# Altium PCB 立创EDA_PCB_2021-11-04.pcbdoc
Units mil, origin at the board's own origin, x right, y up, seen from the top; angles counter-clockwise.
Board outline 4632.05 x 6746.26 mil, 2 copper layers (Top Layer, Bottom Layer); 28 components, 43 nets, 127 pads, 46 vias.
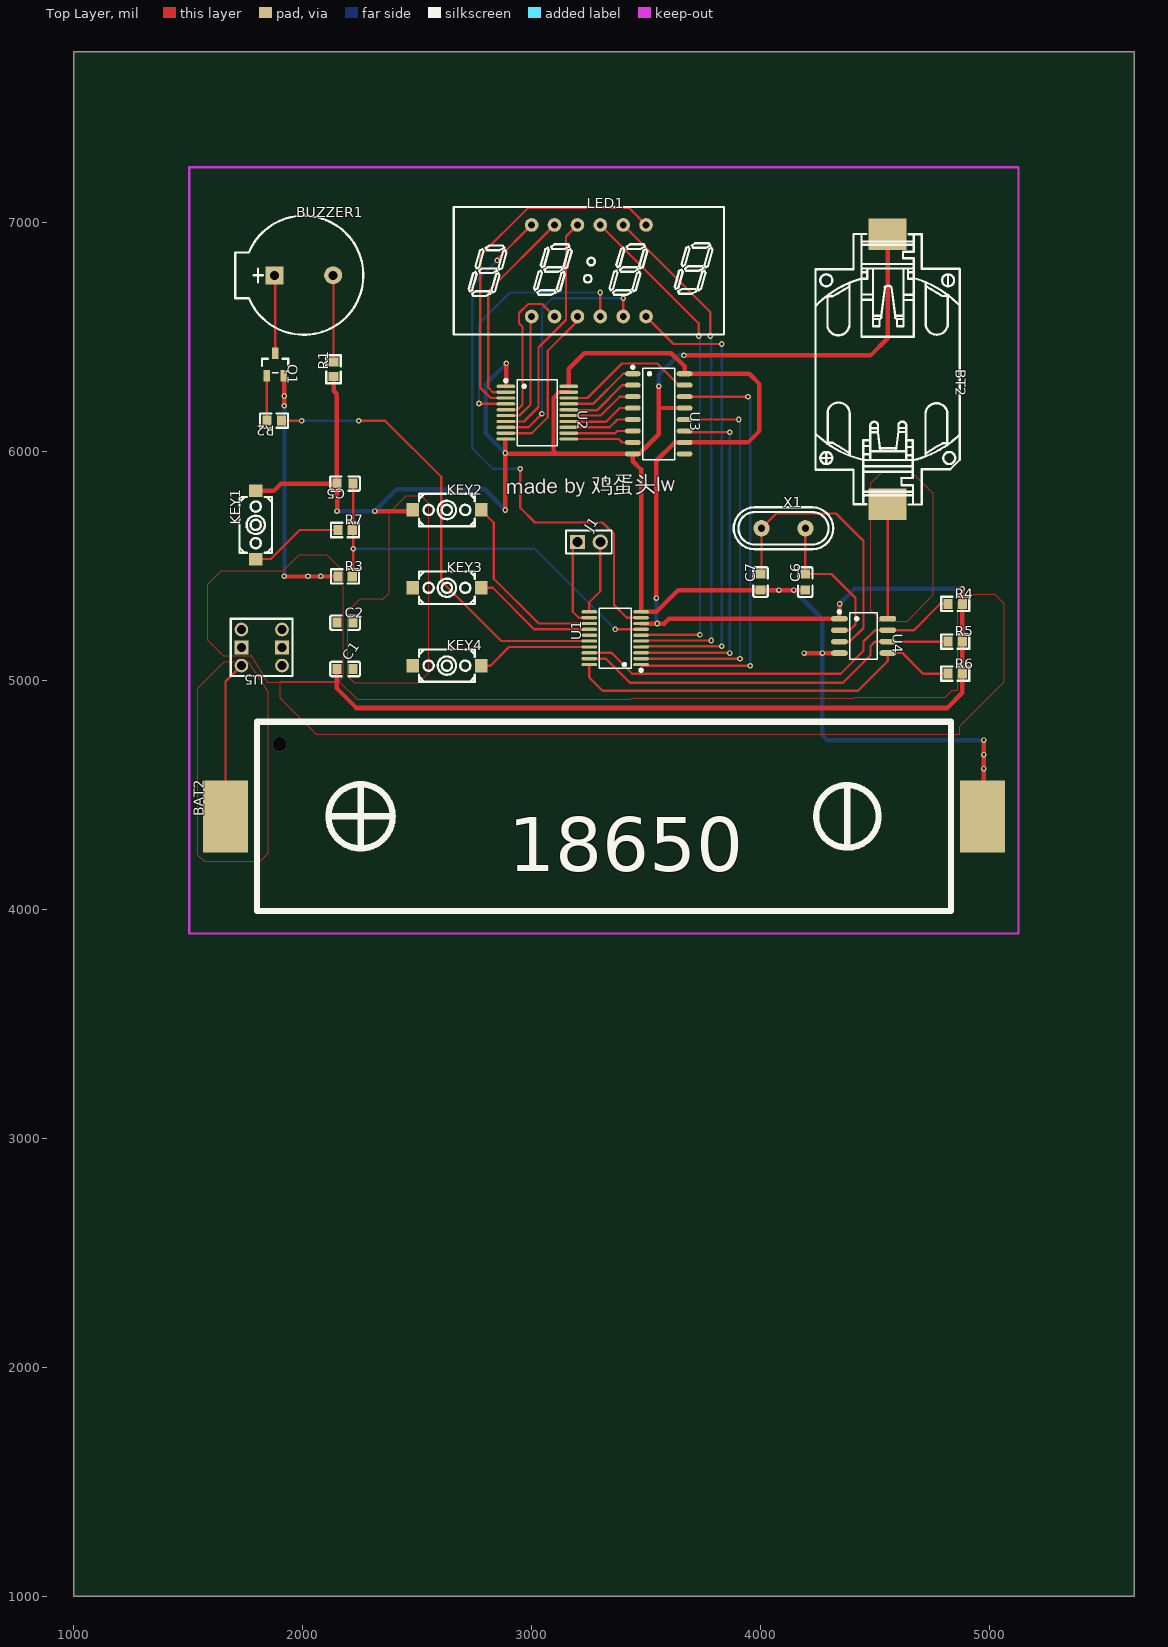
[diagram p0: Top Layer view]
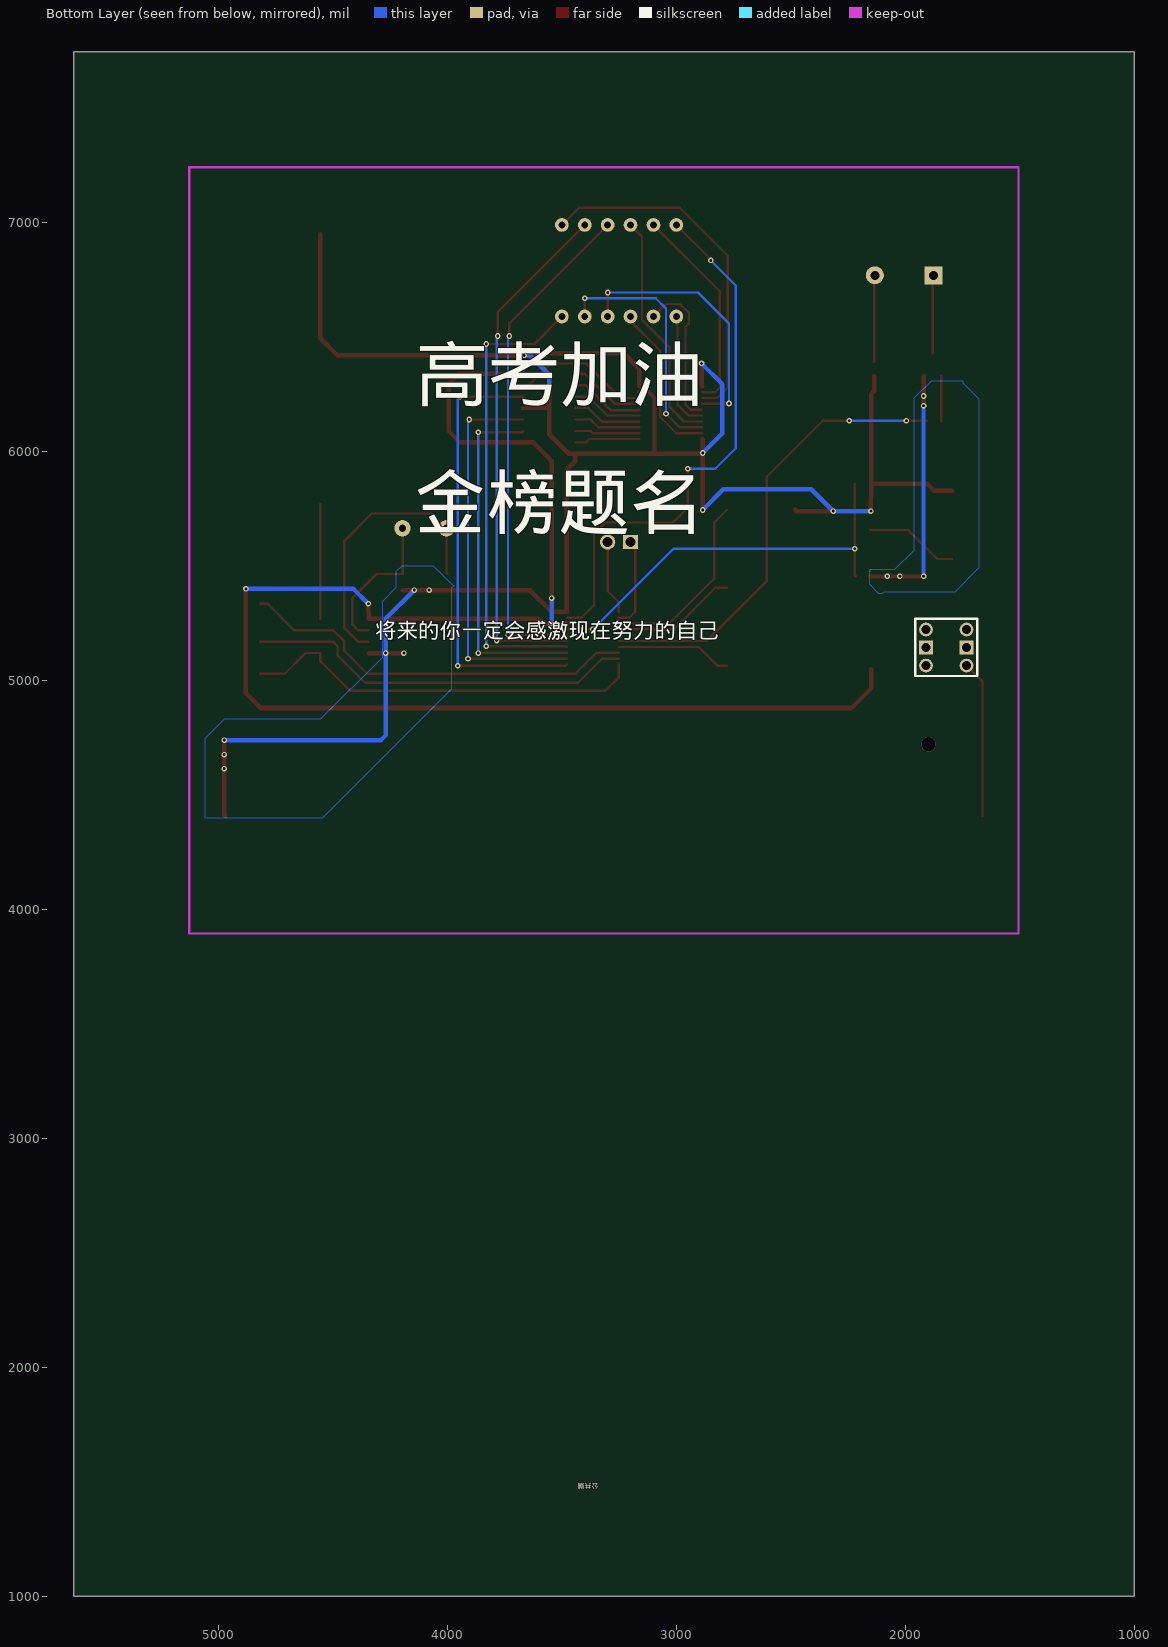
[diagram p1: Bottom Layer view, seen from below]

## Layer stack, top to bottom
Top Layer: signal copper (thickness not stored)
Dielectric: dielectric 12.6, FR-4, Dk 4.8
Bottom Layer: signal copper (thickness not stored)

## Board outline
5632.05,1000 1000,1000 1000,7746.26 5632.05,7746.26

## Components (designator, comment, footprint, x,y, rotation, side; value= is the part's Value field where it differs from the comment)
BAT2 "18650" 18650电池座-贴片 3316.02,4406.61 r90 top
BT2 "BS-6-1" BAT-SMD_BS-6-1 4555,6359.8 r270 top
BUZZER1 "BL-PBZ12065C2705RA" BUZ-SMD_BL-PBZ12065C2705RA 2005,6769.8 r0 top
C1 "0.1u" C0603 2185.01,5050.1 r0 top
C2 "22u" C0603 2185.01,5252.45 r0 top
C5 "10u" C0603 2185.01,5859.9 r180 top
C6 "0.1u" C0603 4195,5429.8 r90 top
C7 "0.1u" C0603 4000,5429.8 r90 top
J1 "HDR-M-2.54_1x2" HDR-M-2.54_1X2 3250,5604.8 r0 top
KEY1 "K2-3.6×6.1_SMD" KEY-SMD_2P-L6.2-W3.6-LS8.0 1795,5679.8 r90 top
KEY2 "K2-3.6×6.1_SMD" KEY-SMD_2P-L6.2-W3.6-LS8.0 2630,5744.8 r0 top
KEY3 "K2-3.6×6.1_SMD" KEY-SMD_2P-L6.2-W3.6-LS8.0 2630,5404.8 r0 top
KEY4 "K2-3.6×6.1_SMD" KEY-SMD_2P-L6.2-W3.6-LS8.0 2630,5064.8 r0 top
LED1 "FJ3462AH" LED-SEG-TH_12P-L30.0-W14.0-P2.54-S10.16-BL_FJ3462XH 3250,6789.8 r0 top
Q1 "2N3906(SOT-23)" SOT-23-3_L2.9-W1.6-P1.90-LS2.8-TR-CW 1880,6379.8 r270 top
R1 "100" R0603 2135,6359.8 r90 top
R2 "100" R0603 1875,6134.8 r180 top
R3 "10k" R0603 2185,5454.8 r0 top
R4 "5.1k" R0603 4850,5334.8 r0 top
R5 "5.1k" R0603 4850,5169.8 r0 top
R6 "5.1k" R0603 4850,5029.8 r0 top
R7 "301R" R0603 2185,5657.35 r0 top
U1 "STC8G1K08-38I-TSSOP20" TSSOP-20_L6.5-W4.4-P0.65-LS6.4-BL 3365,5184.8 r90 top
U2 "74HC245DB" SSOP-20_L7.2-W5.3-P0.65-LS7.8-BL 3025,6169.8 r270 top
U3 "TM74HC595D" SOP-16_L10.0-W3.9-P1.27-LS6.0-BL 3555,6164.8 r270 top
U4 "DS1302M/TR_C910881" SOP-8_L4.9-W3.9-P1.27-LS6.0-BL 4450,5194.8 r270 top
U5 "6脚自锁按钮开关" 6脚自锁开关 1909.52,5065 r180 top
X1 "32.768MHZ" HC-49US_L11.0-W4.6-P4.88 4100,5664.8 r0 top

## Footprints (in the part's own frame and the unit in brackets; to place one, negate y for a bottom-side part, rotate by r counter-clockwise, add the part's x,y. Pads: shape width x height; smd on the part's side, far side on the other; paste and mask are expansions set on the pad)
6脚自锁开关 [mm]
  round 1.524 hole 1: 1(0,0) 2(4.5,0) 5(0,-4) 6(4.5,-4)
  rect 1.524x1.524 hole 1: 3(0,-2) 4(4.5,-2)
  silkscreen extent -1.18,-5.21 5.68,1.14
18650电池座-贴片 [mm]
  rect 8x5 smd: 1(0,42) 2(0,-42)
  silkscreen extent -10.5,-38.5 10.5,38.5
BAT-SMD_BS-6-1 [mm]
  rect 3.5x4.2 smd: 1(14.988,0) 2(-14.988,0)
  silkscreen extent -14.99,-8 15.01,8
BUZ-SMD_BL-PBZ12065C2705RA [mm]
  rect 2x2 hole 1: 1(-3.25,0)
  round 2 hole 1: 2(3.25,0)
  silkscreen extent -7.62,-6.6 6.6,6.6
C0603 [mm]
  rect 1x1.1 smd: 1(-0.9,0) 2(0.9,0)
  silkscreen extent -1.65,-0.8 1.65,0.8
HC-49US_L11.0-W4.6-P4.88 [mm]
  round 1.8 hole 0.8: 1(-2.44,0) 2(2.44,0)
  silkscreen extent -5.51,-2.32 5.51,2.32
HDR-M-2.54_1X2 [mm]
  rect 1.7x1.575 hole 1.1: 1(-1.27,0)
  round 1.7 hole 1.1: 2(1.27,0)
  silkscreen extent -2.54,-1.27 2.54,1.27
KEY-SMD_2P-L6.2-W3.6-LS8.0 [mm]
  rect 1.4x1.5 smd: 1(-3.8,0) 2(3.8,0)
  silkscreen extent -3.1,-1.8 3.1,1.8
LED-SEG-TH_12P-L30.0-W14.0-P2.54-S10.16-BL_FJ3462XH [mil]
  round 60 hole 30: 1(-250,-200) 2(-150,-200) 3(-50,-200) 4(50,-200) 5(150,-200) 6(250,-200) 7(250,200) 8(150,200) 9(50,200) 10(-50,200) 11(-150,200) 12(-250,200)
  silkscreen extent -591,-279 591,279
R0603 [mm]
  rect 1x1.1 smd: 1(-0.8,0) 2(0.8,0)
  silkscreen extent -1.55,-0.8 1.55,0.81
SOP-8_L4.9-W3.9-P1.27-LS6.0-BL [mm]
  oval 0.63x1.865 smd: 1(-1.905,-2.682) 2(-0.635,-2.682) 3(0.635,-2.682) 4(1.905,-2.682) 5(1.905,2.682) 6(0.635,2.682) 7(-0.635,2.682) 8(-1.905,2.682)
  silkscreen extent -2.82,-2.83 2.58,1.52
SOP-16_L10.0-W3.9-P1.27-LS6.0-BL [mm]
  oval 0.56x1.745 smd: 1(-4.445,-2.873) 2(-3.175,-2.873) 3(-1.905,-2.873) 4(-0.635,-2.873) 5(0.635,-2.873) 6(1.905,-2.873) 7(3.175,-2.873) 8(4.445,-2.873) 9(4.445,2.873) 10(3.175,2.873) 11(1.905,2.873) 12(0.635,2.873) 13(-0.635,2.873) 14(-1.905,2.873) 15(-3.175,2.873) 16(-4.445,2.873)
  silkscreen extent -5.33,-3.02 5.08,1.77
SOT-23-3_L2.9-W1.6-P1.90-LS2.8-TR-CW [mm]
  rect 1.25x0.7 smd: 1(1.25,0.95) 2(1.25,-0.95) 3(-1.25,0)
  silkscreen extent -0.65,-1.46 0.9,1.46
SSOP-20_L7.2-W5.3-P0.65-LS7.8-BL [mm]
  oval 0.364x2.082 smd: 1(-2.925,-3.491) 2(-2.275,-3.491) 3(-1.625,-3.491) 4(-0.975,-3.491) 5(-0.325,-3.491) 6(0.325,-3.491) 7(0.975,-3.491) 8(1.625,-3.491) 9(2.275,-3.491) 10(2.925,-3.491) 11(2.925,3.491) 12(2.275,3.491) 13(1.625,3.491) 14(0.975,3.491) 15(0.325,3.491) 16(-0.325,3.491) 17(-0.975,3.491) 18(-1.625,3.491) 19(-2.275,3.491) 20(-2.925,3.491)
  silkscreen extent -3.71,-3.64 3.68,2.22
TSSOP-20_L6.5-W4.4-P0.65-LS6.4-BL [mm]
  oval 0.364x1.742 smd: 1(-2.925,-2.871) 2(-2.275,-2.871) 3(-1.625,-2.871) 4(-0.975,-2.871) 5(-0.325,-2.871) 6(0.325,-2.871) 7(0.975,-2.871) 8(1.625,-2.871) 9(2.275,-2.871) 10(2.925,-2.871) 11(2.925,2.871) 12(2.275,2.871) 13(1.625,2.871) 14(0.975,2.871) 15(0.325,2.871) 16(-0.325,2.871) 17(-0.975,2.871) 18(-1.625,2.871) 19(-2.275,2.871) 20(-2.925,2.871)
  silkscreen extent -3.71,-3.02 3.33,1.77

## Via types
v1: diameter 24.41, hole 12, Top Layer to Bottom Layer, 45 vias
v2: diameter 62.99, hole 62.99, Top Layer to Bottom Layer, 1 vias

## Nets (pads, with @x,y where several pads share a name; then routed paths per layer and width w, separated by ;. In a path a pad name is that pad's centre, name@x,y a point inside that pad or via, vN(x,y) a via of type N, cw(c..) or ccw(c..) an arc to the next point about the centre after c; other vN are vias at no path point)
595IO: U1.1 U3.14 | length 1935
  Top Layer w10: U1.1 3482.87,5064.8 v1(3955,5064.8) ; U3.14 v1(3945,6239.8)
  Bottom Layer w10: v1(3945,6239.8) 3955,6229.8 v1(3955,5064.8)
595RCK: U1.2 U3.12 | length 1716.1
  Top Layer w10: U1.2 3478.46,5094.8 v1(3910,5094.8) ; U3.12 v1(3905,6139.8)
  Bottom Layer w10: v1(3905,6139.8) 3910,6134.8 v1(3910,5094.8)
595SCK: U1.3 U3.11 | length 1551.4
  Top Layer w10: U1.3 3863.98,5120.82 v1(3865,5119.8) ; U3.11 3673.09,6084.8 v1(3865,6084.8)
  Bottom Layer w10: v1(3865,5119.8) v1(3865,6084.8)
A: LED1.11 U2.2 | length 916.2
  Top Layer w10: U2.2 2830.4,6259.4 2810,6279.8 2810,6699.8 LED1.11
B: LED1.7 U2.3 | length 1549.7
  Top Layer w10: U2.3 2821,6233.8 2775,6279.8 2775,6854.8 2985,7064.8 3425,7064.8 LED1.7
BEEP: R2.1 U1.16 | length 2010.8
  Top Layer w10: R2.1 v1(1995,6134.8) ; v1(2245,6134.8) 2360,6134.8 2605,5889.8 2605,5434.8 2867.79,5172.01 U1.16
  Bottom Layer w10: v1(1995,6134.8) v1(2245,6134.8)
BUZZER1_1: BUZZER1.1 Q1.3 | length 342
  Top Layer w10: BUZZER1.1 1880,6766.85 Q1.3
BUZZER1_2: BUZZER1.2 R1.2 | length 379.4
  Top Layer w10: BUZZER1.2 2135,6767.76 R1.2
C: LED1.4 U2.4 | length 1159.1
  Top Layer w10: v1(2770,6209.8) 2771.61,6208.19 U2.4 ; LED1.4 v1(3300,6694.8)
  Bottom Layer w10: v1(2770,6209.8) 2770,6559.8 2905,6694.8 v1(3300,6694.8)
D: LED1.2 U2.5 | length 682.2
  Top Layer w10: U2.5 2937.8,6182.6 2960,6204.8 2960,6544.8 2945,6559.8 2945,6604.8 2985,6644.8 3045,6644.8 LED1.2
D12: LED1.3 U2.9 | length 705.1
  Top Layer w10: U2.9 3000.4,6080.2 3070,6149.8 3070,6439.8 3200,6569.8 LED1.3
DIG1: LED1.12 U1.9 | length 2408.6
  Top Layer w10: v1(2850,6834.8) 2850,6839.8 LED1.12 ; v1(2950,5924.8) 2950,5754.8 3015,5689.8 3310,5689.8 3360,5639.8 3360,5329.8 3415.4,5274.4 U1.9
  Bottom Layer w10: v1(2850,6834.8) 2740,6724.8 2740,6014.8 2830,5924.8 v1(2950,5924.8)
DIG2: LED1.9 U1.6 | length 2228.1
  Top Layer w10: LED1.9 3730,6559.8 v1(3730,6504.8) ; U1.6 3480.23,5199.8 v1(3735,5199.8)
  Bottom Layer w10: v1(3730,6504.8) 3735,6499.8 v1(3735,5199.8)
DIG3: LED1.8 U1.5 | length 2282.6
  Top Layer w10: LED1.8 3780,6609.8 v1(3780,6504.8) ; U1.5 3480.82,5174.8 v1(3785,5174.8)
  Bottom Layer w10: v1(3780,6504.8) 3785,6499.8 v1(3785,5174.8)
DIG4: LED1.6 U1.4 | length 2053.1
  Top Layer w10: U1.4 3481.42,5149.8 v1(3830,5149.8) ; LED1.6 3620,6469.8 v1(3830,6469.8)
  Bottom Layer w10: v1(3830,5149.8) v1(3830,6469.8)
E: LED1.1 U2.6 | length 517.2
  Top Layer w10: U2.6 2947.2,6157 2995,6204.8 2995,6589.8 LED1.1
F: LED1.10 U2.7 | length 1034.1
  Top Layer w10: U2.7 2966.6,6131.4 3030,6194.8 3030,6454.8 3150,6574.8 3150,6939.8 LED1.10
G: LED1.5 U2.8 | length 1095.5
  Top Layer w10: U2.8 2986.02,6105.82 v1(3045,6164.8) ; LED1.5 v1(3400,6669.8)
  Bottom Layer w10: v1(3045,6164.8) 3045,6624.8 3090,6669.8 v1(3400,6669.8)
GND: BAT2.2 BT2.2 C1.2 C2.2 C5.2 C6.1 C7.1 KEY1.2 KEY2.1 KEY3.1 KEY4.1 R1.1 U1.10 U2.1 U2.10 U2.19 U3.8 U3.13 U4.4 | length 9093.5
  Top Layer w17.72: 3105,5994.8 3095,5994.8 3095,6234.8 3119.6,6259.4 U2.19
  Top Layer w19.68: KEY1.2 1874.6,5829.4 1905.1,5859.9 C5.2 ; R1.1 2135,6264.8 2149.6,6250.2 C5.2 ; v1(2150,5739.8) C5.2 ; v1(2315,5739.8) 2475.4,5739.8 KEY2.1 ; v1(2885,5744.8) v1(2885,5993.48) ; U2.10 2885,6052.08 v1(2885,5993.48) ; U2.1 2890,6287.4 v1(2890,6384.8) ; v1(3555,6284.8) 3555,6074.8 3470,5989.8 U3.8 ; 3560,6190.3 U3.13 ; v1(3665,6419.8) 4480,6419.8 4555,6494.8 BT2.2 ; C7.1 4000.43,5394.8 v1(4080,5394.8) v1(4145,5394.8) 4194.56,5394.8 C6.1 ; C7.1 3639.6,5394.4 3545.2,5300 U1.10 3478,5921.8 3441.9,5957.9 U3.8 ; v1(4190,5119.8) U4.4 ; BAT2.2 4975,4412 v1(4975,4615.14) 4975,4676.25 v1(4975,4739.8) ; v1(2885,5993.48) 2885,5989.8 U3.8
  Bottom Layer w19.68: v1(2150,5739.8) v1(2315,5739.8) 2410,5834.8 2795,5834.8 v1(2885,5744.8) ; v1(2885,5993.48) 2800,6078.5 2800,6294.8 v1(2890,6384.8) ; v1(3555,6284.8) 3555,6334.8 3640,6419.8 v1(3665,6419.8) ; v1(4145,5394.8) 4270,5269.8 v1(4270,5119.8) 4270,4759.8 4290,4739.8 v1(4975,4739.8)
  other v1: 4975,4676.25
KEY0: KEY2.2 U1.13 | length 821.1
  Top Layer w10: KEY2.2 2835,5689.4 2835,5444.8 3031,5248.8 U1.13
KEY1: KEY3.2 U1.14 | length 547.6
  Top Layer w10: KEY3.2 2830,5404.8 3011.6,5223.2 U1.14
KEY2: KEY4.2 U1.17 | length 506.2
  Top Layer w10: KEY4.2 2820,5064.8 2901.6,5146.4 U1.17
Q1_2: Q1.2 R2.2 | length 195.8
  Top Layer w10: Q1.2 R2.2
R7_1: KEY1.1 R7.1 | length 411.2
  Top Layer w10: KEY1.1 1860.4,5530.2 1987.6,5657.4 R7.1
RST: C5.1 R3.2 R7.2 U1.7 | length 1810.3
  Top Layer w10: R3.2 2220.45,5458.75 v1(2220.45,5575.72) C5.1 ; v1(3365,5223.19) U1.7
  Bottom Layer w10: v1(2220.45,5575.72) 3012.47,5575.72 v1(3365,5223.19)
T_CE: R6.1 U1.20 U4.5 | length 1773.1
  Top Layer w10: U1.20 3252,5012.8 3310,4954.8 4425,4954.8 4555.6,5085.4 U4.5 4620,5119.8 4710,5029.8 R6.1
T_IO: R5.1 U1.19 U4.6 | length 1708
  Top Layer w10: U1.19 3325,5094.8 3430,4989.8 4360,4989.8 4480,5109.8 4480,5149.8 4500,5169.8 U4.6 R5.1
T_SCLK: R4.1 U1.18 U4.7 | length 1754
  Top Layer w10: U1.18 3349,5120.8 3440,5029.8 4350,5029.8 4450,5129.8 4450,5169.8 4500,5219.8 U4.7 4670,5219.8 4785,5334.8 R4.1
U1_11: J1.2 U1.11 | length 324.7
  Top Layer w10: U1.11 3252,5341.8 3300,5389.8 J1.2
U1_12: J1.1 U1.12 | length 395.8
  Top Layer w10: J1.1 3180,5584.8 3180,5299.8 3205.4,5274.4 U1.12
U2_11: U2.11 U3.7 | length 285.6
  Top Layer w10: U2.11 3380.2,6054.6 3395,6039.8 U3.7
U2_12: U2.12 U3.6 | length 283.5
  Top Layer w10: U2.12 3365.4,6080.2 3375,6089.8 U3.6
U2_13: U2.13 U3.5 | length 293.6
  Top Layer w10: U2.13 3341,6105.8 3375,6139.8 U3.5
U2_14: U2.14 U3.4 | length 305
  Top Layer w10: U2.14 3164,6129.8 3325,6129.8 3385,6189.8 U3.4
U2_15: U2.15 U3.3 | length 313.8
  Top Layer w10: U2.15 3302.2,6157 3385,6239.8 U3.3
U2_16: U2.16 U3.2 | length 326.2
  Top Layer w10: U2.16 3165.2,6179.8 3285,6179.8 3395,6289.8 U3.2
U2_17: U2.17 U3.1 | length 334
  Top Layer w10: U2.17 3268.4,6208.2 3400,6339.8 U3.1
U2_18: U2.18 U3.15 | length 607.6
  Top Layer w10: U2.18 3243.98,6233.78 3395,6384.8 3549.15,6384.8 3644.15,6289.8 U3.15
U4_2: C6.2 U4.2 X1.2 | length 659.6
  Top Layer w10: C6.2 4309.6,5465.2 4415,5359.8 4415,5244.8 4390,5219.8 U4.2 ; C6.2 4195,5663.74 X1.2
U4_3: C7.2 U4.3 X1.1 | length 1234.4
  Top Layer w10: C7.2 4003.94,5469.18 X1.1 ; X1.1 4068.9,5729.8 4330,5729.8 4450,5609.8 4450,5229.8 4390,5169.8 U4.3
U4_8: BT2.1 U4.8 | length 500.2
  Top Layer w10: BT2.1 4555.61,5769.12 U4.8
U5_2: BAT2.1 U5.2 | length 687.3
  Top Layer w10: BAT2.1 1662.48,4995.13 U5.2
VCC: C1.1 C2.1 Q1.1 R3.1 R4.2 R5.2 R6.2 U1.8 U2.20 U3.10 U3.16 U4.1 U5.4 | length 8380
  Top Layer w17.72: v1(1920,5454.8) v1(2023.29,5454.8) v1(2078.85,5454.8) R3.1
  Top Layer w19.68: Q1.1 1920,6328 v1(1920,6242.72) v1(1920,6199.8) ; C1.1 2149.6,4965.2 2235,4879.8 2362.18,4879.8 2567.74,4879.8 2899.22,4879.8 4815,4879.8 4881.5,4946.3 R6.2 4880,5031.29 v1(4880,5399.8) ; U2.20 3162.4,6362.2 3230,6429.8 3610,6429.8 3668.1,6371.7 U3.16 3950,6339.8 3995,6294.8 3995,6089.8 3945,6039.8 U3.10 3625,6039.8 3545,5959.8 v1(3545,5359.8) ; U1.8 v1(3548.6,5248.8) 3579,5248.8 3600,5269.8 U4.1 v1(4345,5334.8)
  Bottom Layer w17.72: v1(1920,5454.8) v1(1920,6199.8)
  Bottom Layer w19.68: v1(3545,5359.8) 3545,5252.4 v1(3548.6,5248.8) ; v1(4345,5334.8) 4410,5399.8 v1(4880,5399.8)
pads on no net: U1.15 U3.9 U5.1 U5.3 U5.5 U5.6
copper on no net:
  other v2: 1898.7,4721.57

## Polygon pours and split planes (outlines as drawn)
GND on Bottom Layer (solid): 5060,4399.8 4545,4399.8 3980,4964.8 3980,5404.8 3970,5414.8 3975,5414.8 4060,5499.8 4200,5499.8 4225,5474.8 4225,5404.8 4285,5344.8 4285,5099.8 4555,4829.8 4975,4829.8 5060,4744.8 5060,4709.8
VCC on Bottom Layer (solid): 2155,5484.8 2045,5484.8 1960,5569.8 1960,6209.8 1960,6234.8 1885,6309.8 1750,6309.8 1750,6299.8 1680,6229.8 1680,5489.8 1685,5484.8 1785,5384.8 2095,5384.8 2100,5379.8 2115,5379.8 2155,5419.8 2155,5479.8 2155,5474.8
GND on Top Layer (solid): 2195,5019.8 2225,4989.8 2505,4989.8 2550,5034.8 2550,5774.8 2520,5804.8 2450,5804.8 2375,5729.8 2375,5379.8 2345,5349.8 2340,5354.8 2250,5354.8 2195,5299.8 2195,5284.8 2195,5019.8 2195,5024.8
U5_2 on Top Layer (solid): 1765,5079.8 1655,5079.8 1540,4964.8 1540,4414.8 1540,4419.8 1540,4304.8 1540,4274.8 1540,4239.8 1570,4209.8 1815,4209.8 1850,4244.8 1850,4654.8 1850,4949.8
VCC on Top Layer (solid): 1775,5109.8 1770,5104.8 1655,5104.8 1585,5174.8 1585,5419.8 1645,5479.8 1915,5479.8 1985,5549.8 2105,5549.8 2165,5489.8 2175,5489.8 2175,5014.8 2150,4989.8 1845,4989.8 1845,4994.8
VCC on Top Layer (solid): 5065,4994.8 5065,5334.8 5025,5374.8 4895,5374.8 4860,5339.8 4860,5039.8 4860,4954.8 4835,4954.8 4805,4924.8 4410,4924.8 4405,4919.8 3435,4919.8 3430,4914.8 2240,4914.8 2160,4994.8 1905,4994.8 1900,4989.8 1900,4924.8 2060,4764.8 3410,4764.8 4870,4764.8 4870,4799.8 5065,4994.8
U4_8 on Top Layer (solid): 4510,5259.8 4640,5259.8 4755,5374.8 4755,5814.8 4660,5909.8 4530,5909.8 4480,5859.8 4480,5309.8 4525,5264.8 4545,5264.8

## Silkscreen, mask and mechanical layers (free items; w line width, h text height)
Top Overlay:
  text "made by 鸡蛋头lw" at 2890,5789.8 h118.11 r1
Bottom Overlay:
  text "高考加油" at 4135,6149.8 h393.7
  text "金榜题名" at 4145,5589.8 h393.7
  text "将来的你一定会感激现在努力的自己" at 4315,5159.8 h118.11

## Text inside footprints (layer, text, board x,y; h text height)
U5: Bottom Overlay "公共端" at 3339.52,1500 h39.37 r180